# Altium PCB stm32f407_copter.PcbDoc
Units mil, origin at the board's own origin, x right, y up, seen from the top; angles counter-clockwise.
Board outline 2185 x 2115 mil, 4 copper layers (Top Layer, Signal Layer 2, Signal, Bottom Layer), stack 47.234 mil thick; 67 components, 56 nets, 303 pads, 114 vias.
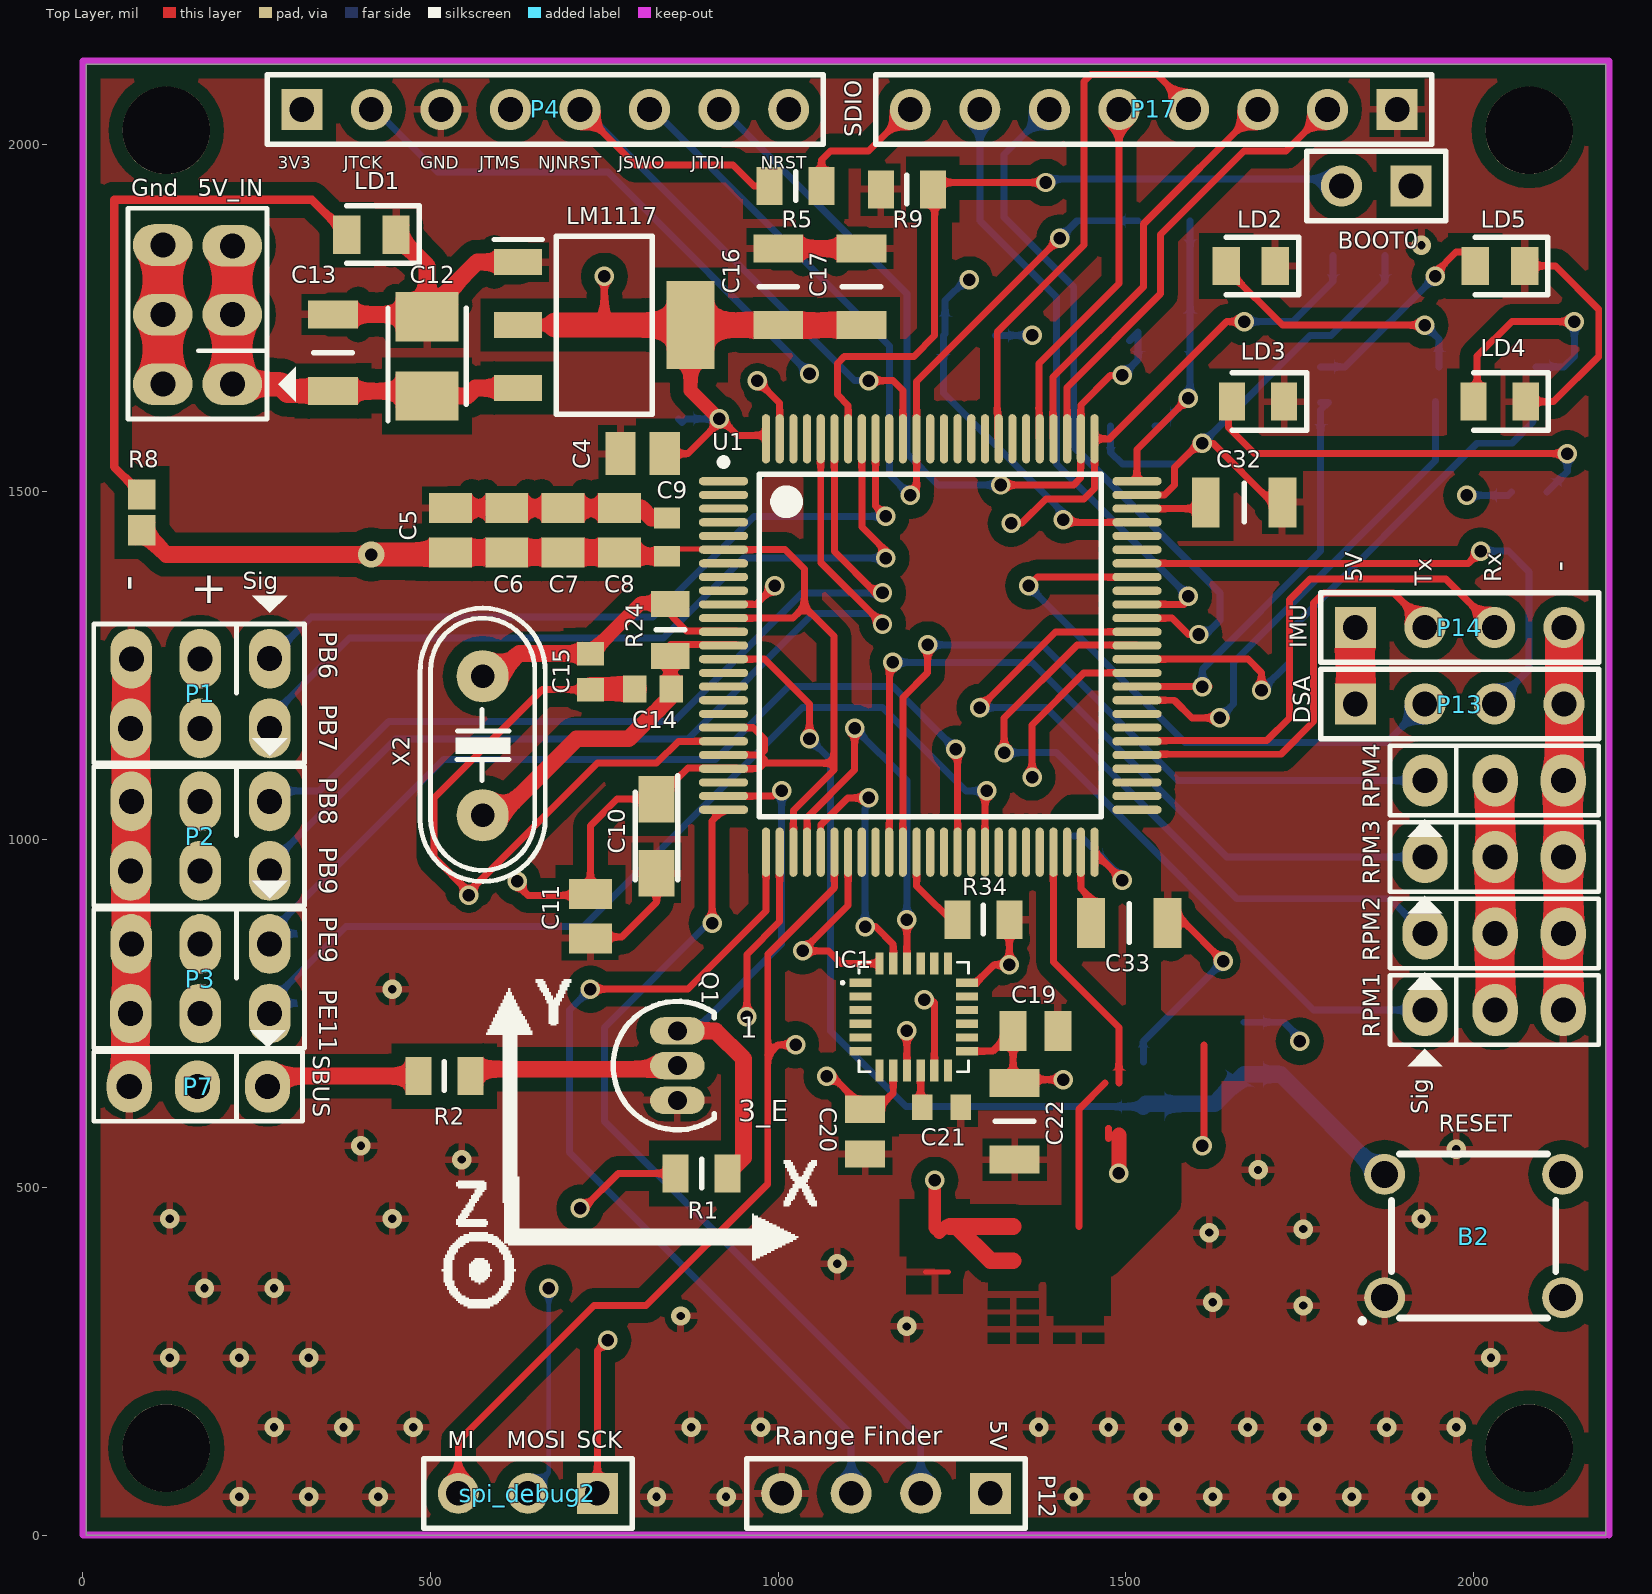
[diagram p0: Top Layer view]
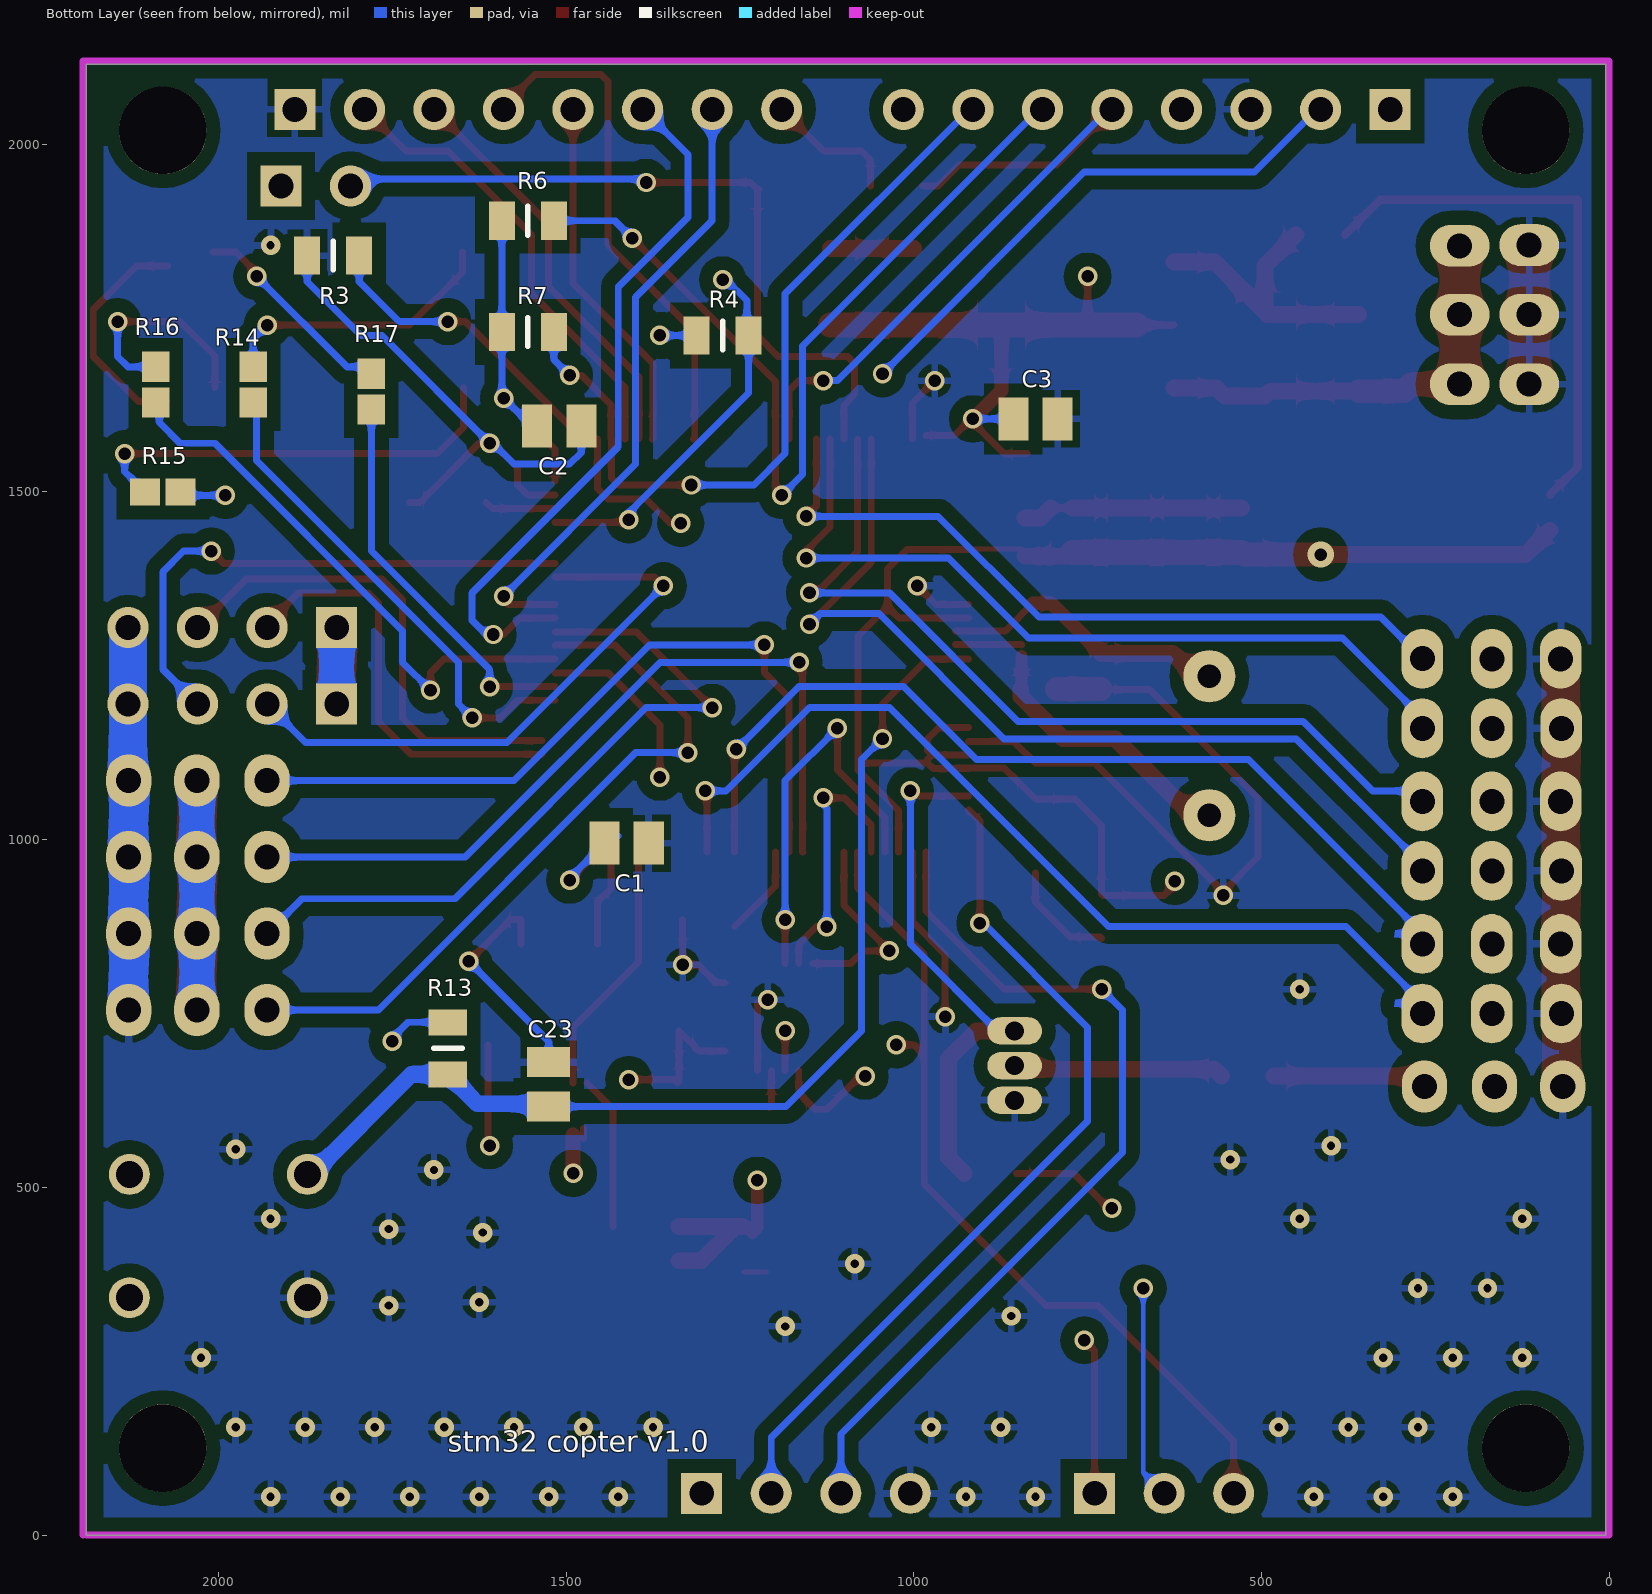
[diagram p1: Bottom Layer view, seen from below]
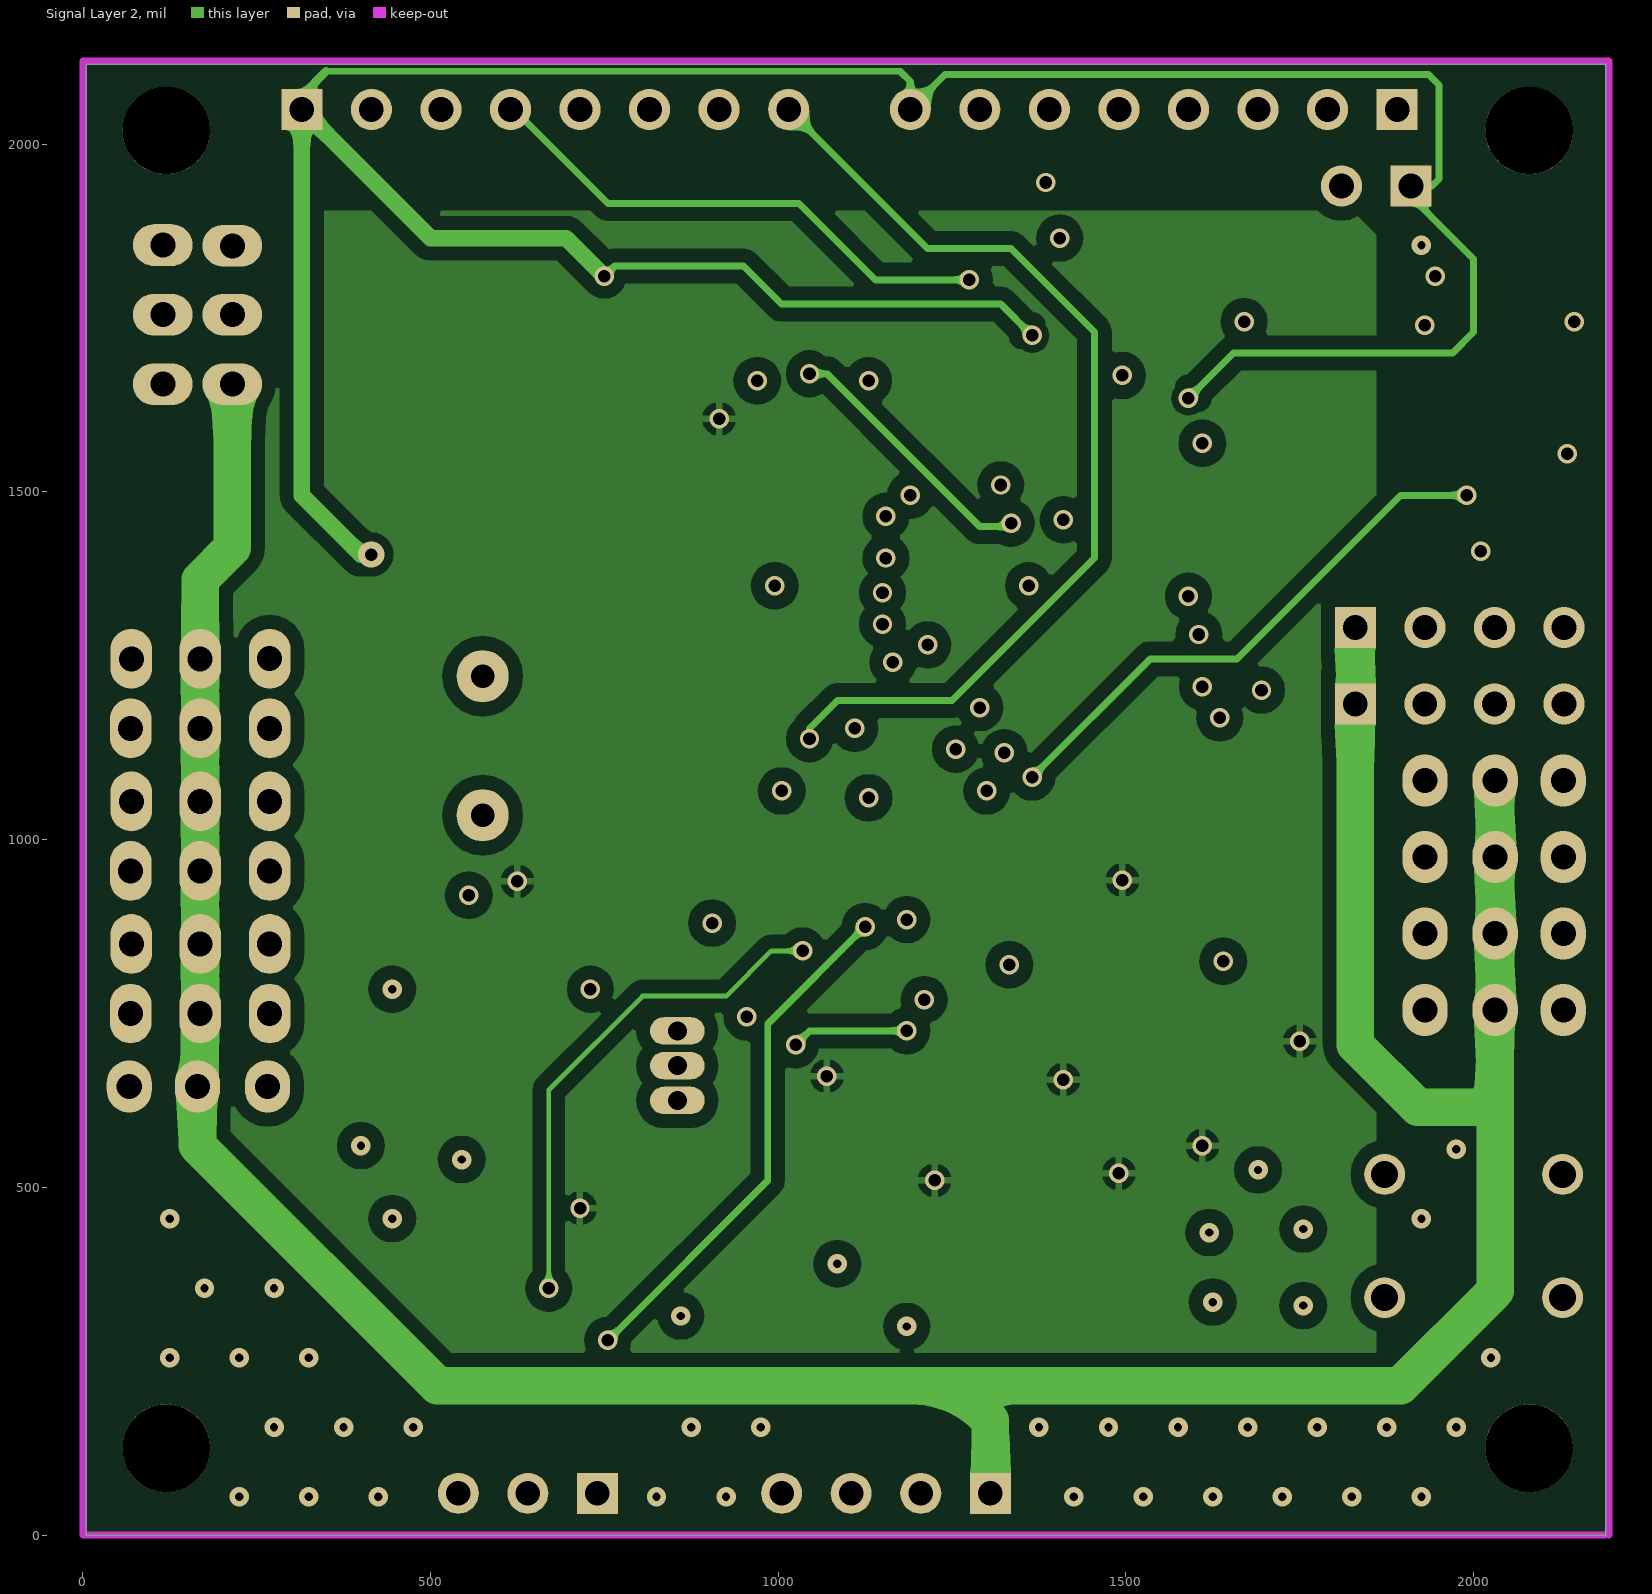
[diagram p2: Signal Layer 2]
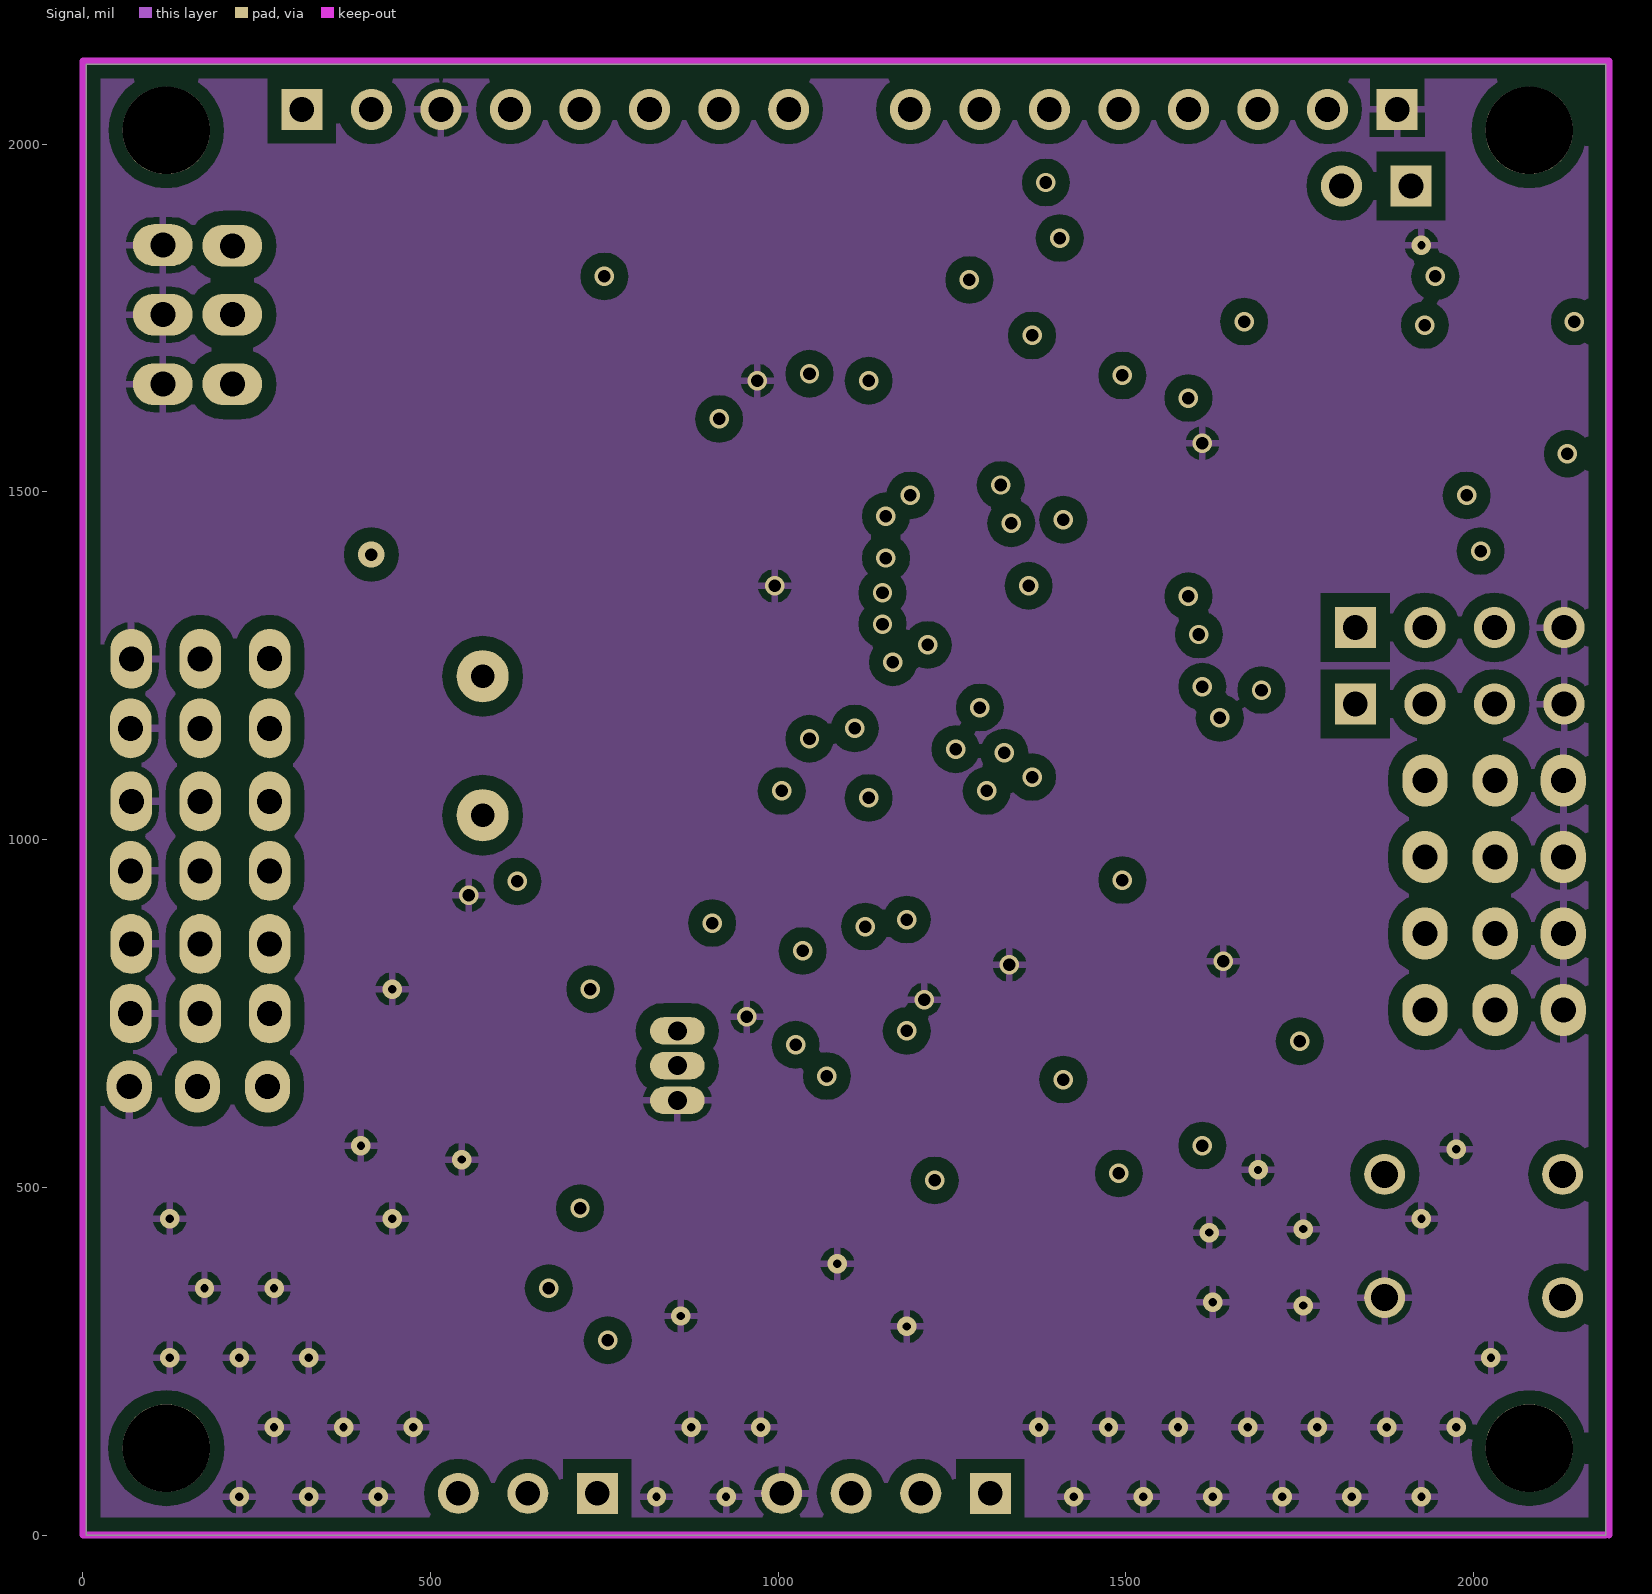
[diagram p3: Signal]
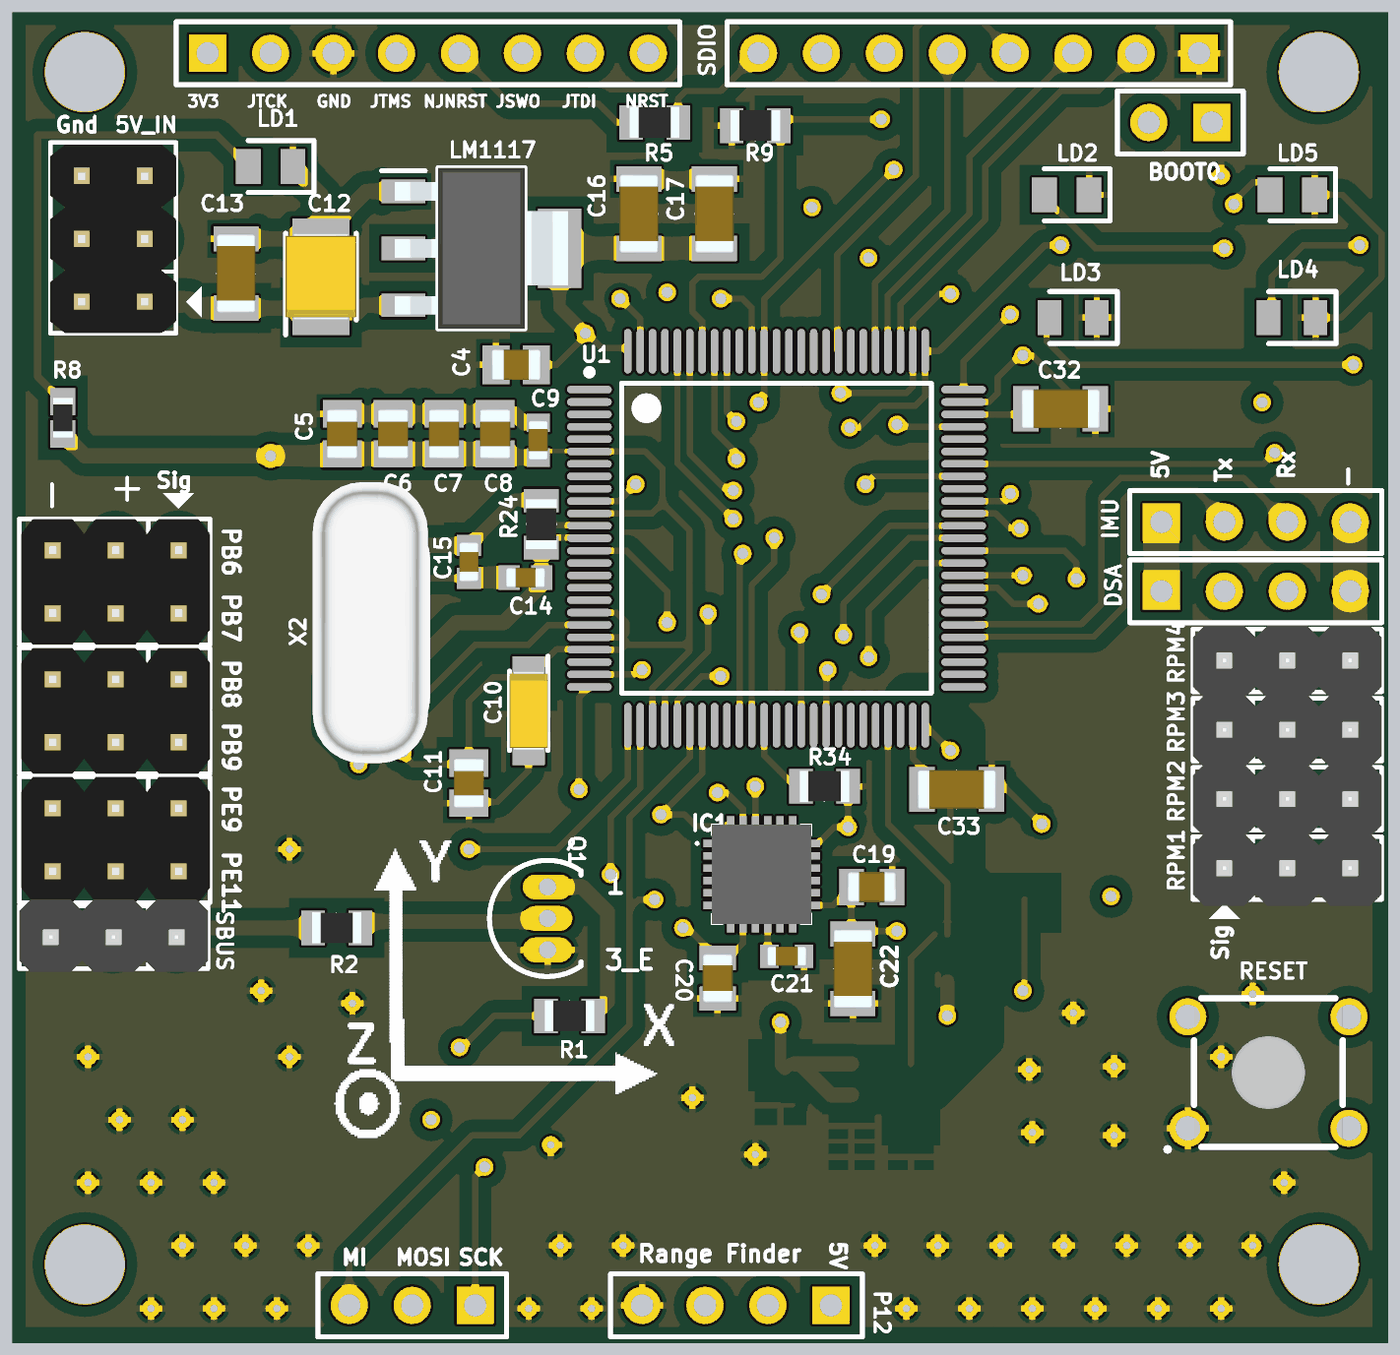
[diagram p4: 3D render of the assembled board from above, using the file's embedded part models]
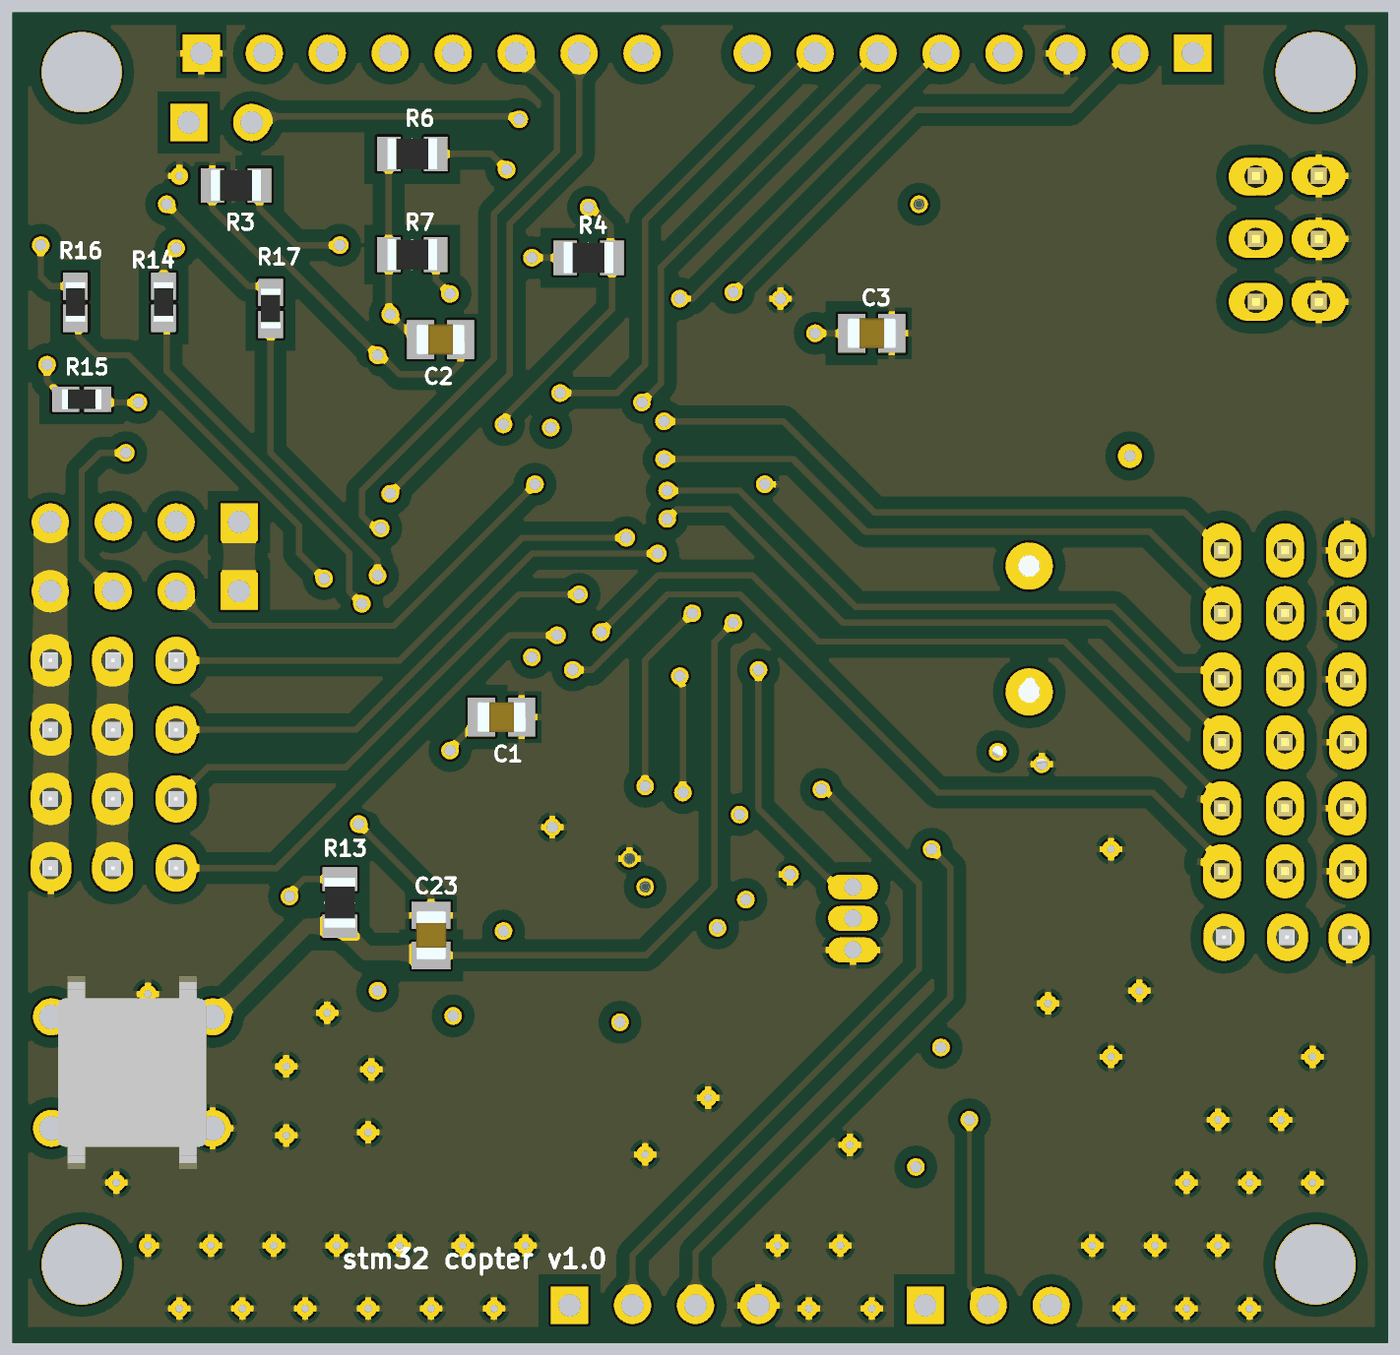
[diagram p5: 3D render of the assembled board from below, using the file's embedded part models]

## Layer stack, top to bottom
Top Solder: solder mask 0.4, Solder Resist, Dk 3.5
Top Layer: signal copper 1.4
Dielectric 1: core 24, FR-4, Dk 4.2
Signal Layer 2: signal copper 1.417
Dielectric 3: prepreg 5, FR-4, Dk 4.2
Signal: signal copper 1.417
Dielectric 2: core 12.6, FR-4, Dk 4.2
Bottom Layer: signal copper 1.4
Bottom Solder: solder mask 0.4, Solder Resist, Dk 3.5

## Board outline
5,0 5,2115 2190,2115 2190,0

## Design rules (kind name [scope] priority, off if disabled: settings)
Clearance [All] p1: gap=7 except(10: THPad-Region; 20: Arc-Poly Arc-Region Track-Poly Track-Region SMDPad-Poly SMDPad-Region THPad-Poly Via-Poly Via-Region Fill-Poly Fill-Region Poly-Poly Poly-Region Region-Region)
HoleSize [All] p1: absolutevalues=TRUE maxlimit=140 minlimit=1 maxpercent=80.000 minpercent=20.000
PolygonConnect [All] p1: connectstyle=Relief reliefconductorwidth=10 reliefentries=4 polygonreliefangle="90 Angle" airgapwidth=10
RoomDefinition user [InComponentClass('user')] p1: confinementstyle=ConfineIn formatcopy=TRUE lockcomponents=FALSE outline 3965,2200 7905,2200 7905,3085 3965,3085
RoomDefinition STM32F407VGT6 [InComponentClass('STM32F407VGT6')] p2: confinementstyle=ConfineIn formatcopy=TRUE lockcomponents=FALSE outline 3966.65,1230 7631.65,1230 7631.65,2160 3966.65,2160
RoomDefinition SENSORS [InComponentClass('SENSORS')] p3: confinementstyle=ConfineIn formatcopy=TRUE lockcomponents=FALSE outline 3965,255 5700,255 5700,1175 3965,1175
RoomDefinition power [InComponentClass('power')] p4: confinementstyle=ConfineIn formatcopy=TRUE lockcomponents=FALSE outline 3965,-320 7830,-320 7830,205 3965,205
RoomDefinition Pinout [InComponentClass('Pinout')] p5: confinementstyle=ConfineIn formatcopy=TRUE lockcomponents=FALSE outline 3975,-930 6305,-930 6305,-405 3975,-405
RoutingVias [All] p1: holewidth=28 width=15 viastyle="Through Hole" minholewidth=18 minwidth=28 maxholewidth=25 maxwidth=38
SolderMaskExpansion [All] p1: expansion=4
Width [All] p1: maxlimit=54 minlimit=7 preferedwidth=10 midlayer1_maxwidth=10 bottomlayer_maxwidth=48 minimp=50.000000 maximp=50.000000 favimp=50.000000
29 further rules are at their usual default settings.

## Classes and differential pairs
component class Pinout: P1 P2 P3 P7 P10 P12 P13 P14 RPM1 RPM2 RPM3 RPM4
component class power: 5V_IN C1 C2 C3 C4 C5 C6 C7 C8 C9 C10 C11 C12 C13 C16 C17 LD1 LM1117 R8
component class SENSORS: C19 C20 C21 C22 IC1 P17 spi_debug2
component class STM32F407VGT6: BOOT0 C14 C15 C32 C33 P4 Q1 R1 R2 R3 R4 R5 R6 R7 R9 R24 R34 U1 X2
component class user: B2 C23 LD2 LD3 LD4 LD5 R13 R14 R15 R16 R17

## Components (designator, comment, footprint, x,y, rotation, side; value= is the part's Value field where it differs from the comment)
5V_IN "INPUT_POWER" JP3x2#1 165,1755 r90 top
B2 "RESET" 3-1825910-5 2000,430 r180 top
BOOT0 "Header 2" HDR1X2 1910,1940 r180 top
C1 "104" CAPC2012X98N 1413.11,995 r180 bottom
C2 "104" CAPC2012X98N 1510,1595 r180 bottom
C3 "104" CAPC2012X98N 825,1605 r180 bottom
C4 "104" CAPC2012X98N 805,1555 r180 top
C5 "104" CAPC2012X98N 528.66,1445 r90 top
C6 "104" CAPC2012X98N 609.65,1445 r90 top
C7 "104" CAPC2012X98N 690.63,1445 r90 top
C8 "104" CAPC2012X98N 771.61,1445 r90 top
C9 "1uF" CAPC1608X90N 840,1435 r270 top
C10 "1uF" CAPPM3216X180N 825,1005 r270 top
C11 "104" CAPC2012X98N 730,890 r270 top
C12 "10uF" CAPPM3528X210N 495,1695 r90 top
C13 "Cap_0603" CAPC3216X135N 360,1700.12 r270 top
C14 "22pF" CAPC1608X95N 820,1216.65 r180 top
C15 "22pF" CAPC1608X95N 730,1241.65 r270 top
C16 "Cap_0603" CAPC3216X135N 1000,1795 r270 top
C17 "Cap_0603" CAPC3216X135N 1120,1795 r270 top
C19 "0.1uF" CAPC2012X145N 1370,725 r0 top
C20 "10nF" CAPC2012X145N 1125,580 r270 top
C21 "0.47uF" CAPC1608X90N 1235,615 r180 top
C22 "2.2uF" CAPC3216X125N 1340,595 r90 top
C23 "104" CAPC2012X98N 1525,648.11 r90 bottom
C32 "2.2uF" CAPC3216X125N 1670,1485 r180 top
C33 "2.2uF" CAPC3216X125N 1505,880 r180 top
IC1 "ICM-20689" ICM20689 1195,745 r0 top
LD1 "LTST-C171GKT" LEDC2012X120N 415,1870 r180 top
LD2 "LTST-C171GKT" LEDC2012X120N 1679.57,1825 r180 top
LD3 "LTST-C171GKT" LEDC2012X90N 1690,1630 r180 top
LD4 "LTST-C171GKT" LEDC2012X90N 2037.6,1630 r180 top
LD5 "LTST-C171GKT" LEDC2012X120N 2038.03,1825 r180 top
LM1117 "LM1117IMPX3.3_NOPB" SOT230P700X180-4N 750,1740 r0 top
P1 "PWM1" JP3x2#2 168.79,1210 r180 top
P2 "PWM2" JP3x2#1 168.79,1005 r180 top
P3 "PWM3" JP3x2#1 168.79,800 r180 top
P4 "Header 8" HDR1X8 315,2050 r0 top
P7 "SBUS" JP3 165.79,645 r180 top
P12 "Range Finder" HDR1X4 1305,60 r180 top
P13 "DSA" HDR1X4 1830,1195 r0 top
P14 "IMU" HDR1X4 1830,1305 r0 top
P17 "SDIO" HDR1X8 1890,2050 r180 top
Q1 "NPN1" TO-92 855,675 r0 top locked
R1 "" RESC2012X60N 890,520 r0 top
R2 "1K" RESC2012X60N 520,660 r180 top
R3 "" RESC2012X60N 1835,1840 r0 bottom
R4 "" RESC2012X60N 1275,1725 r0 bottom
R5 "" RESC2012X60N 1025,1940 r180 top
R6 "" RESC2012X60N 1555,1890 r180 bottom
R7 "" RESC2012X60N 1555,1730 r0 bottom
R8 "" RESC1608X55N 85,1470.59 r90 top
R9 "" RESC2012X60N 1185,1935 r180 top
R13 "" RESC2012X60N 1670,700 r270 bottom locked
R14 "" RESC1608X55N 1950,1654.41 r90 bottom
R15 "" RESC1608X55N 2080,1500 r0 bottom
R16 "" RESC1608X55N 2090,1654.41 r90 bottom
R17 "" RESC1608X55N 1780,1644.41 r90 bottom
R24 "" RESC2012X60N 845,1301.65 r90 top
R34 "" RESC2012X60N 1295,885 r180 top
RPM1 "Jumper 3" JP3 2030,755 r0 top
RPM2 "Jumper 3" JP3 2030,865 r0 top
RPM3 "Jumper 3" JP3 2030,975 r0 top
RPM4 "Jumper 3" JP3 2030,1085 r0 top
spi_debug2 "Header 3" HDR1X3 740,60 r180 top
U1 "STM32F407VGT6" STM-LQFP100_N 1218.66,1279.21 r0 top
X2 "8Mhz" XT2 575,1135 r270 top

## Footprints (in the part's own frame and the unit in brackets; to place one, negate y for a bottom-side part, rotate by r counter-clockwise, add the part's x,y. Pads: shape width x height; smd on the part's side, far side on the other; paste and mask are expansions set on the pad)
3-1825910-5 [mm]
  round 1.49 hole 0.99: 1(3.25,2.25) 2(3.25,-2.25) 3(-3.25,2.25) 4(-3.25,-2.25)
  silkscreen extent -3,-3 4.11,3.14, body extent -3,-3.9 3,3.9
CAPC1608X90N [mm]
  rect 0.75x0.94 smd: 1(-0.7,0) 2(0.7,0)
  body extent -0.8,-0.4 0.8,0.4, height 0.9
CAPC1608X95N [mm]
  rect 0.86x0.98 smd: 1(-0.66,0) 2(0.66,0)
  body extent -0.8,-0.4 0.8,0.4, height 0.95
CAPC2012X98N [mm]
  rect 1.1x1.57 smd: 1(-0.81,0) 2(0.81,0)
  body extent -1,-0.63 1,0.62, height 0.98
CAPC2012X145N [mm]
  rect 0.99x1.47 smd: 1(-0.82,0) 2(0.82,0)
  body extent -1,-0.63 1,0.63, height 1.45
CAPC3216X125N [mm]
  rect 1.02x1.82 smd: 1(-1.4,0) 2(1.4,0)
  silkscreen extent 0,-0.7 0,0.7, body extent -1.6,-0.8 1.6,0.8, height 1.25
CAPC3216X135N [mm]
  rect 1.02x1.82 smd: 1(-1.4,0) 2(1.4,0)
  silkscreen extent 0,-0.7 0,0.7, body extent -1.6,-0.8 1.6,0.8, height 1.35
CAPPM3216X180N [mm]
  rect 1.7x1.3 smd: 1(-1.35,0) 2(1.35,0)
  silkscreen extent -2.2,-0.77 1.6,0.77, body extent -1.6,-0.77 1.6,0.77, height 1.8
CAPPM3528X210N [mm]
  rect 1.8x2.3 smd: 1(-1.45,0) 2(1.45,0)
  silkscreen extent -2.35,-1.43 1.75,1.43, body extent -1.75,-1.43 1.75,1.43, height 2.1
HDR1X2 [mm] "Connector; Header; 2 Position"
  rect 1.5x1.5 hole 0.9: 1(0,0)
  round 1.5 hole 0.9: 2(2.54,0)
  silkscreen extent -1.27,-1.27 3.81,1.27
HDR1X3 [mm] "Connector; Header; 3 Position"
  rect 1.5x1.5 hole 0.9: 1(0,0)
  round 1.5 hole 0.9: 2(2.54,0) 3(5.08,0)
  silkscreen extent -1.27,-1.27 6.35,1.27
HDR1X4 [mm] "Connector; Header; 4 Position"
  rect 1.5x1.5 hole 0.9: 1(0,0)
  round 1.5 hole 0.9: 2(2.54,0) 3(5.08,0) 4(7.62,0)
  silkscreen extent -1.27,-1.27 8.89,1.27
HDR1X8 [mm] "Connector; Header; 8 Position"
  rect 1.5x1.5 hole 0.9: 1(0,0)
  round 1.5 hole 0.9: 2(2.54,0) 3(5.08,0) 4(7.62,0) 5(10.16,0) 6(12.7,0) 7(15.24,0) 8(17.78,0)
  silkscreen extent -1.27,-1.27 19.05,1.27
ICM20689 [mm]
  rect 0.8x0.3 smd: 1(-1.95,1.25) 2(-1.95,0.75) 3(-1.95,0.25) 4(-1.95,-0.25) 5(-1.95,-0.75) 6(-1.95,-1.25) 13(1.95,-1.25) 14(1.95,-0.75) 15(1.95,-0.25) 16(1.95,0.25) 17(1.95,0.75) 18(1.95,1.25)
  rect 0.3x0.8 smd: 7(-1.25,-1.95) 8(-0.75,-1.95) 9(-0.25,-1.95) 10(0.25,-1.95) 11(0.75,-1.95) 12(1.25,-1.95) 19(1.25,1.95) 20(0.75,1.95) 21(0.25,1.95) 22(-0.25,1.95) 23(-0.75,1.95) 24(-1.25,1.95)
  silkscreen extent -2.65,-2 2,2, body extent -2,-2 2,2, height 1.1
JP3 [mil] "Jumper 3"
  oval 65x75 hole 36: 1(-100,0) 2(1,0) 3(99,0)
  silkscreen extent -150,-81 150,50, body extent -150,-60 150,55, height 355
JP3x2#1 [mil] "Connector 3x2"
  oval 60x86 hole 36: 1(-100,-50) 2(0,-50) 3(99,-50) 4(-100,50) 5(0,50) 6(100,50)
  silkscreen extent -150,-141 153,100, body extent -150,-100 150,100, height 335
JP3x2#2 [mil] "Connector 3x2"
  oval 60x86 hole 36: 1(-100,-50.25) 2(0,-50) 3(99,-50) 4(-100,50) 5(0,50) 6(100,50)
  silkscreen extent -150,-141 153,100, body extent -150,-100 150,100, height 335
LEDC2012X90N [mm]
  rect 0.95x1.4 smd: 1(-0.95,0) 2(0.95,0)
  silkscreen extent -1.78,-1.05 0.95,1.05
LEDC2012X120N [mm]
  rect 1x1.4 smd: 1(-0.9,0) 2(0.9,0)
  silkscreen extent -1.75,-1.05 0.9,1.05
RESC1608X55N [mm]
  rect 1.1x1 smd: 1(-0.65,0) 2(0.65,0)
  body extent -0.8,-0.4 0.8,0.4, height 0.55
RESC2012X60N [mm]
  rect 0.95x1.4 smd: 1(-0.95,0) 2(0.95,0)
  silkscreen extent 0,-0.53 0,0.53, body extent -1,-0.62 1,0.62, height 0.6
SOT230P700X180-4N [mm]
  rect 1.75x0.95 smd: 1(-3.15,2.3) 2(-3.15,0) 3(-3.15,-2.3)
  rect 1.75x3.2 smd: 4(3.15,0)
  silkscreen extent -4.03,-3.25 1.75,3.25, body extent -3.5,-3.25 3.5,3.25, height 1.8
STM-LQFP100_N [mm] "Thin QFP, 100-Leads, Body 14x14mm, Pitch 0.5mm, IPC Medium Density"
  oval 1.8x0.3 smd: 1(-7.55,6) 2(-7.55,5.5) 3(-7.55,5) 4(-7.55,4.5) 5(-7.55,4) 6(-7.55,3.5) 7(-7.55,3) 8(-7.55,2.5) 9(-7.55,2) 10(-7.55,1.5) 11(-7.55,1) 12(-7.55,0.5) 13(-7.55,0) 14(-7.55,-0.5) 15(-7.55,-1) 16(-7.55,-1.5) 17(-7.55,-2) 18(-7.55,-2.5) 19(-7.55,-3) 20(-7.55,-3.5) 21(-7.55,-4) 22(-7.55,-4.5) 23(-7.55,-5) 24(-7.55,-5.5) 25(-7.55,-6) 51(7.55,-6) 52(7.55,-5.5) 53(7.55,-5) 54(7.55,-4.5) 55(7.55,-4) 56(7.55,-3.5) 57(7.55,-3) 58(7.55,-2.5) 59(7.55,-2) 60(7.55,-1.5) 61(7.55,-1) 62(7.55,-0.5) 63(7.55,0) 64(7.55,0.5) 65(7.55,1) 66(7.55,1.5) 67(7.55,2) 68(7.55,2.5) 69(7.55,3) 70(7.55,3.5) 71(7.55,4) 72(7.55,4.5) 73(7.55,5) 74(7.55,5.5) 75(7.55,6)
  oval 0.3x1.8 smd: 26(-6,-7.55) 27(-5.5,-7.55) 28(-5,-7.55) 29(-4.5,-7.55) 30(-4,-7.55) 31(-3.5,-7.55) 32(-3,-7.55) 33(-2.5,-7.55) 34(-2,-7.55) 35(-1.5,-7.55) 36(-1,-7.55) 37(-0.5,-7.55) 38(0,-7.55) 39(0.5,-7.55) 40(1,-7.55) 41(1.5,-7.55) 42(2,-7.55) 43(2.5,-7.55) 44(3,-7.55) 45(3.5,-7.55) 46(4,-7.55) 47(4.5,-7.55) 48(5,-7.55) 49(5.5,-7.55) 50(6,-7.55) 76(6,7.55) 77(5.5,7.55) 78(5,7.55) 79(4.5,7.55) 80(4,7.55) 81(3.5,7.55) 82(3,7.55) 83(2.5,7.55) 84(2,7.55) 85(1.5,7.55) 86(1,7.55) 87(0.5,7.55) 88(0,7.55) 89(-0.5,7.55) 90(-1,7.55) 91(-1.5,7.55) 92(-2,7.55) 93(-2.5,7.55) 94(-3,7.55) 95(-3.5,7.55) 96(-4,7.55) 97(-4.5,7.55) 98(-5,7.55) 99(-5.5,7.55) 100(-6,7.55)
  silkscreen extent -7.67,-6.25 6.25,6.82, body extent -7,-7 7,7, height 1.6
TO-92 [mm] "TO, Flat Index; 3 In-Line, Axial Leads; Body Dia. 4.6mm; Leads 0.41 x 0.39 mm (max)"
  oval 2x1 hole 0.7: 1(0,1.27) 2(0,0) 3(0,-1.27)
  silkscreen extent -2.34,-2.34 1.35,2.34
XT2 [mil] "Footpin for Crystal 2 pin"
  round 75 hole 34: 1(-100,0) 2(100,0)
  silkscreen extent -198,-90 195,90, body extent -233,-93 213,90, height 138

## Part data
5V_IN P1 P2 P3: library part JP3x2, "Connector 3x2"
B2: library part SW-PB, "Switch"
BOOT0: "Header, 2-Pin"
C1 C2 C3 C4 C5 C6 C7 C8 C9 C11 C14 C15 C19 C20 C21 C22 C23 C32 C33: library part "Cap Semi", "Capacitor (Semiconductor SIM Model)"
C10: library part "Cap Pol2", "Polarized Capacitor (Axial)"
C12: library part Cap_Tan_1210, "Tantalum Capacitor"
C13 C16 C17: "Capacitor"
IC1 LM1117: "Integrated Circuit"
LD1 LD2 LD3 LD4 LD5: "LED"
P4: "Header, 8-Pin"
P7: library part JP3, "Jumper 3"
P12 P13 P14: library part "Header 4", "Header, 4-Pin"
P17: library part "Header 8", "Header, 8-Pin"
Q1: "NPN Darlington Bipolar Transistor"
R1 R2 R3 R4 R5 R6 R7 R8 R9 R13 R14 R15 R16 R17 R24 R34: library part Res3, "Resistor"
RPM1 RPM2 RPM3 RPM4: library part JP3
spi_debug2: "Header, 3-Pin"
U1: "ARM Cortex-M4 32-bit MCU+FPU, 210 DMIPS, 1024 kB Flash, 192 kB Internal RAM, 82 I/Os, 100-pin LQFP, -40 to 85 degC, Tray"
X2: library part XT2, "Crystal For all Crystal 2pin."

## Free pads (board coordinates)
  round 126 hole 126: 2(2080,2020) 3(2080,125) 4(120,125) 5(120,2020)

## Via types
v1: diameter 28, hole 18, Top Layer to Bottom Layer, 68 vias
v2: diameter 28, hole 12, Top Layer to Bottom Layer, 45 vias
v3: diameter 38, hole 18, Top Layer to Bottom Layer, 1 vias

## Nets (pads, with @x,y where several pads share a name; then routed paths per layer and width w, separated by ;. In a path a pad name is that pad's centre, name@x,y a point inside that pad or via, vN(x,y) a via of type N, cw(c..) or ccw(c..) an arc to the next point about the centre after c; other vN are vias at no path point)
3V3: BOOT0.1 C1.1 C2.1 C3.1 C4.1 C5.1 C6.1 C7.1 C8.1 C9.2 C10.1 C11.1 C16.2 C17.2 C19.1 C20.1 C22.2 IC1.8 IC1.13 LM1117.2 LM1117.4 P4.1 P17.8 R1.1 R4.2 R5.1 R6.1 R7.2 R8.1 R13.1 U1.6 U1.11 U1.19 U1.21 U1.22 U1.28 U1.50 U1.75 U1.100 | length 9286.8
  Top Layer w7: C8.1 C8.1@777.28,1407.44 ; C9.2 C9.2@844.33,1403.11 ; C9.2@844.33,1418.11 U1.6@940,1418.11
  Top Layer w10: v1(625,940) 625,935 640,920 728.11,920 C11.1 730,1020 768.15,1058.15 C10.1 870,1103.15 U1.22@940,1103.15 ; LM1117.2 680,1740 ; v1(715,470) 720,470 770,520 R1.1 ; 750,1740 v1(750,1810) ; C4.1 870,1555 915,1600 920,1600 v1(915,1605) 917.91,1605 941.46,1581.46 U1.100@982.44,1581.46 ; U1.22 972.05,1102.05 980,1110 ; U1.21 973.27,1121.73 ; U1.19 963.9,1161.1 980,1145 980,1128.46 973.27,1121.73 ; U1.11 1021.21,1318.58 1037.63,1335 ; U1.6 1009.69,1417.01 1037.63,1389.06 1037.63,1335 ; U1.28 1021.81,1041.81 1080,1100 1080,1110 ; R5.1 1062.4,1977.4 1075,1990 1130,1990 P17.8 ; v1(1070,660) 1077.28,660 C20.1 1142.28,612.28 1165.47,635.47 IC1.8 ; IC1.13 1308.5,695.79 C19.1 1337.72,652.4 C22.2 1344.88,655 v1(1410,655) ; U1.50 v1(1495,941.85) ; U1.75 1515.91,1560.91 v1(1590,1635) ; 973.27,1121.73 980,1115 980,1110 ; 980,1110 1080,1110 ; 1037.63,1335 1080,1292.63 1080,1110
  Top Layer w20: LM1117.4 874.02,1645.98 v1(915,1605)
  Top Layer w24: R8.1 120,1410 v3(415,1410) ; C8.1@777.28,1407.44 C9.2
  Top Layer w34: v3(415,1410) C5.1@525,1410
  Top Layer w36: C5.1 C6.1 C7.1 C8.1 ; 680,1740 750,1740 LM1117.4 874.13,1739.88 C16.2 C17.2
  Signal Layer 2 w10: 350,2105 1175,2105 1190,2090 P17.8 1240,2100 1935,2100 1950,2085 1950,1950 1940,1940 BOOT0.1 1915,1935 1915,1920 2000,1835 2000,1730 1970,1700 1655,1700 v1(1590,1635) ; v1(750,1810) 765,1825 950,1825 1005,1770 1320,1770 v1(1365,1725)
  Signal Layer 2 w12: P4.1@315,2070 350,2105
  Signal Layer 2 w24: P4.1 315,1495 400,1410 v3(415,1410) ; P4.1@330,2035 500,1865 695,1865 v1(750,1810)
  Bottom Layer w10: C3.1 861.89,1600 866.89,1605 v1(915,1605) ; R4.2 v1(1365,1725) ; C1.1@1425,1005 1435,1005 C1.1 1495,945 v1(1495,941.85) ; C2.1 1550,1595 v1(1590,1635) 1592.4,1637.4 R7.2 R6.1 ; R13.1 1727.6,737.4 1750,715 v1(1750,710)
5V_IN: 5V_IN.1 5V_IN.2 5V_IN.3 C12.1 C13.2 LM1117.3 P1.2 P1.5 P2.2 P2.5 P3.2 P3.5 P7.2 P12.1 P13.1 P14.1 RPM1.2 RPM2.2 RPM3.2 RPM4.2 | length 6437.2
  Top Layer w24: C13.2 487.91,1645 C12.1 552.91,1637.91 564.45,1649.45 LM1117.3
  Top Layer w34: 5V_IN.1 285,1655 295,1645 C13.2
  Top Layer w54: 5V_IN.1 5V_IN.2 5V_IN.3 ; P13.1 P14.1 ; RPM1.2 RPM2.2 RPM3.2 RPM4.2
  Signal Layer 2 w54: 5V_IN.1 215,1420 168.79,1373.79 P1.2 P1.5 P2.2 P2.5 P3.2 P3.5 168.79,649 P7.2 164.79,560.21 510,215 1255,215 ; P12.1 1305,165 1255,215 ; P14.1 P13.1 1830,705 1920,615 2016,615 2031,630 ; RPM4.2 RPM3.2 RPM2.2 RPM1.2 2031,630 ; 1255,215 1895,215 2031,351 2031,630
  Bottom Layer w48: P13.1 P14.1 ; RPM1.2 RPM2.2 RPM3.2 RPM4.2
BOOT0: BOOT0.2 R9.1 U1.94 | length 1079.5
  Top Layer w10: U1.94 1100.55,1624.45 1085,1640 1085,1685 1095,1695 1195,1695 1225,1725 R9.1@1225,1935 ; R9.1 R9.1@1225,1935 ; v1(1385,1945) 1235,1945 R9.1@1225,1935
  Bottom Layer w10: v1(1385,1945) 1390,1945 1395,1950 1800,1950 BOOT0.2
BOOT1: R34.2 U1.37 | length 131.3
  Top Layer w10: U1.37 1198.98,933.62 R34.2@1257.6,875
GND: 5V_IN.4 5V_IN.5 5V_IN.6 B2.1 C1.2 C2.2 C3.2 C4.2 C5.2 C6.2 C7.2 C8.2 C9.1 C10.2 C11.2 C12.2 C13.1 C14.2 C15.2 C16.1 C17.1 C19.2 C20.2 C21.1 C22.1 C23.2 C32.1 C33.1 IC1.11 IC1.18 LD1.1 LD2.1 LD3.1 LD4.1 LD5.1 LM1117.1 P1.3 P1.6 P2.3 P2.6 P3.3 P3.6 P4.3 P7.3 P12.4 P13.4 P14.4 P17.1 Q1.3 R3.2 R9.2 R34.1 RPM1.3 RPM2.3 RPM3.3 RPM4.3 U1.10 U1.20 U1.27 U1.74 U1.99 | length 6138.6
  Top Layer w7: C8.2 803.11,1476.89 ; v1(1332.4,820) v1@1335,817.4
  Top Layer w10: v1(555,920) v1@555,925 ; C11.2 731.89,860 775,860 825,910 C10.2 ; C15.2@730.98,1216.65 C15.2 660.67,1215.67 505,1060 505,975 v1@555,925 ; U1.20 856.42,1141.42 825,1110 740,1110 v1@555,925 ; U1.10 968.27,1338.27 v1(995,1365) ; v1(955,745) 955,835 1002.13,882.13 U1.27 ; v1(970,1660) 1002.13,1627.87 U1.99 ; v1(1210,770) 1220,770 1224.53,765.47 IC1.11 ; IC1.18 1284.21,794.21 1310,820 v1(1332.4,820) R34.1 ; U1.74 1555.75,1495.75 1570,1510 1570,1535 1605,1570 v1(1610,1570) 1625,1570 1710,1485 C32.1 ; C33.1@1565.12,850 1565.12,885 1580,885 v1(1640,825) ; LD5.1 2117.5,1825 2180,1762.5 2180,1695 2115,1630 LD4.1
  Top Layer w24: C13.1 491.85,1755.24 C12.2@495,1758.39 ; LD1.1 495,1825.43 C12.2@495,1758.39 ; C5.2 C6.2 C7.2 C8.2 ; LM1117.1 567.17,1830.55 C12.2@495,1758.39 ; 803.11,1476.89 817.44,1462.56 C9.1 ; C16.1 C17.1
  Top Layer w34: C15.2@730.98,1216.65 C14.2
  Top Layer w54: P7.3 68.79,647 P3.6 69.79,751 P3.3 68.79,851 P2.6 69.79,956 P2.3 68.79,1056 P1.6 69.79,1161 P1.3 ; 5V_IN.4 5V_IN.5 5V_IN.6 ; RPM1.3 RPM2.3 RPM3.3 RPM4.3 2130,1086 P13.4 P14.4
  Bottom Layer w10: C2.2 1478.11,1556.89 1495,1540 1575,1540 1605,1570 v1(1610,1570) 1765,1725 1795,1725 1872.4,1802.4 R3.2 ; C23.2 1525,710 v1(1640,825)
  Bottom Layer w54: RPM1.3 RPM2.3 RPM3.3 RPM4.3 2130,1086 P13.4 P14.4
  other v2: 225,55 325,55 425,55 825,55 925,55 1425,55 1525,55 1625,55 1725,55 1825,55 1925,55 275,155 375,155 475,155 875,155 975,155 1375,155 1475,155 1575,155 1675,155 1775,155 1875,155 1975,155 125,255 225,255 325,255 2025,255 1185,300 860,315 1755,330 1625,335 175,355 275,355 1085,390 1620,435 1755,440 125,455 445,455 1925,455 1690,525 545,540 1975,555 400,560 445,785 1925,1855
I2C2_SCL: U1.47 | length 371.2
  Top Layer w10: U1.47 1395.83,824.17 1490,730 1490,649.8
I2C2_SDA: U1.48
JSWO: P4.6 R6.2 U1.89 | length 1297.3
  Top Layer w10: v1(1190,1495) 1198.98,1503.98 U1.89 1198.98,1658.98 v1(1405,1865)
  Bottom Layer w10: P4.6@815,2055 1160,1710 1160,1525 v1(1190,1495) ; v1(1405,1865) 1430,1890 R6.2
JTCK-SWCLK: P4.2 R3.1 U1.76 | length 1861.5
  Top Layer w10: v1(1335,1455) 1350,1455 1385,1490 1440,1490 1454.88,1504.88 U1.76 1476.46,1576.46 1645,1745 v1(1670,1745)
  Signal Layer 2 w10: v1(1045,1670) 1070,1670 1290,1450 1335,1450 v1(1335,1455)
  Bottom Layer w10: P4.2@415,2055 510,1960 755,1960 v1(1045,1670) ; v1(1670,1745) 1740,1745 1797.6,1802.6 R3.1
JTDI: P4.7 R7.1 U1.77 | length 1156.9
  Top Layer w10: v1(1320,1510) 1425,1510 1435,1520 1435,1576.26 U1.77 1435.2,1625.2 1477.5,1667.5 v1(1495,1667.5)
  Bottom Layer w10: P4.7@915,2055 1185,1785 1185,1555 1230,1510 v1(1320,1510) ; v1(1495,1667.5) 1517.6,1690.1 R7.1 R7.1@1505,1717.4
JTMS-SWDIO: P4.4 R4.1 U1.72 | length 1305.8
  Top Layer w10: v1(1410,1460) 1413.62,1456.38 U1.72
  Signal Layer 2 w10: P4.4@615,2055 755,1915 1030,1915 1140,1805 v1(1275,1805)
  Bottom Layer w10: v1(1275,1805) 1270,1805 1240,1775 1240,1727.4 R4.1 1237.6,1642.4 1410,1470 v1(1410,1460)
LED_BLUE: R16.1 U1.62 | length 819.5
  Top Layer w10: U1.62 1675.47,1259.53 1695,1240 v1(1695,1215)
  Bottom Layer w10: v1(1695,1215) 1735,1255 1735,1300 2005,1570 2055,1570 2085,1600 2085,1624.41 R16.1@2090,1629.41
LED_GREEN: R15.1 U1.61 | length 1116.3
  Top Layer w10: v1(1365,1090) 1365,1165 1440,1240 1440.16,1239.84 U1.61
  Signal Layer 2 w10: v1(1365,1090) 1535,1260 1660,1260 1895,1495 v1(1990,1495)
  Bottom Layer w10: v1(1990,1495) 2049.41,1495 R15.1
LED_RED: R14.1 U1.59 | length 723.1
  Top Layer w10: U1.59 1569.53,1200.47 1595,1175 v1(1635,1175) v1@1645,1175
  Bottom Layer w10: v1(1635,1175) 1655,1195 1655,1255 1945,1545 R14.1@1945,1630
LED_YELLOW: R17.1 U1.60 | length 608.9
  Top Layer w10: U1.60 1619.84,1220.16 1619.69,1220 v1(1610,1220)
  Bottom Layer w10: v1(1610,1220) 1610,1245 1780,1415 1780,1617.64 1791.18,1628.82 R17.1@1780,1628.82
M1_RPM: RPM1.1 U1.63 | length 1043
  Top Layer w10: v1(1325,1125) 1325,1175 1430,1280 1515.12,1280 U1.63
  Bottom Layer w10: v1(1325,1125) 1400,1125 1770,755 RPM1.1
M2_RPM: RPM2.1 U1.64 | length 1045.6
  Top Layer w10: v1(1290,1190) 1398.9,1298.9 U1.64
  Bottom Layer w10: v1(1290,1190) 1385,1190 1660,915 1880,915 RPM2.1
M3_RPM: RPM3.1 U1.35 | length 1156.2
  Top Layer w10: U1.35 1160,982.36 1160,1250 v1(1165,1255)
  Bottom Layer w10: v1(1165,1255) 1365,1255 1645,975 RPM3.1
M4_RPM: RPM4.1 U1.36 | length 1108.6
  Top Layer w10: U1.36 1179.29,1204.29 1215,1240 v1(1215,1280)
  Bottom Layer w10: v1(1215,1280) 1380,1280 1575,1085 RPM4.1
NetC14_1: C14.1 R24.1 U1.13 X2.2 | length 495.9
  Top Layer w10: R24.1@845,1280 845.32,1280.32 U1.13@940,1280.32
  Top Layer w17: R24.1 845,1217.64 C14.1
  Top Layer w24: X2.2 600,1035 710,1145 785,1145 818.36,1178.36 818.81,1178.36 829.94,1189.49 829.94,1189.94 845.98,1205.98 C14.1
NetC15_1: C15.1 R24.2 U1.12 X2.1 | length 425.1
  Top Layer w10: R24.2@828.31,1340 868.31,1300 U1.12@940,1300
  Top Layer w20: C15.1 802.36,1340 R24.2@828.31,1340
  Top Layer w24: X2.1 595,1235 627.64,1267.64 C15.1
NetC21_2: C21.2 IC1.10 | length 54.3
  Top Layer w10: IC1.10 1204.84,617.6 C21.2
NetC32_2: C32.2 U1.73 | length 102.7
  Top Layer w10: U1.73 1605.94,1476.06 C32.2
NetC33_2: C33.2 U1.49 | length 140.1
  Top Layer w10: U1.49 1435.2,929.8 1454.88,910.12 C33.2@1454.88,850
NetLD1_2: LD1.2 R8.2 | length 795.7
  Top Layer w12: R8.2 45,1536.18 45,1920 329.57,1920 LD1.2
NetLD2_2: LD2.2 R14.2 | length 409.7
  Top Layer w10: LD2.2@1649.13,1845 1649.13,1815.87 1725,1740 v1(1930,1740)
  Bottom Layer w10: v1(1930,1740) 1950,1720 R14.2
NetLD3_2: LD3.2 R15.2 | length 627.7
  Top Layer w10: LD3.2@1647.6,1650 1647.6,1592.4 1685,1555 v1(2135,1555)
  Bottom Layer w10: R15.2 2135,1529.41 v1(2135,1555)
NetLD4_2: LD4.2 R16.2 | length 316.8
  Top Layer w10: LD4.2@2005.2,1650 2005.2,1695.2 2055,1745 v1(2145,1745)
  Bottom Layer w10: R16.2 2130,1680 2145,1695 v1(2145,1745)
NetLD5_2: LD5.2 R17.2 | length 298.9
  Top Layer w10: v1(1945,1810) 1945,1815 1975,1845 LD5.2@2007.6,1845
  Bottom Layer w10: R17.2@1780,1680 1815,1680 v1(1945,1810)
NetQ1_2: Q1.2 R2.1 | length 291.7
  Top Layer w24: R2.1 567.4,670 Q1.2@845,670
NJNRST: P4.5 R5.2 U1.90 | length 1021.2
  Top Layer w10: P4.5 795,1970 935,1970 965,1940 R5.2 ; v1(1130,1660) 1165,1660 1179.29,1645.71 U1.90
  Bottom Layer w10: P4.5@715,2055 1110,1660 v1(1130,1660)
NRST: B2.2 C23.1 P4.8 R13.2 U1.14 | length 2977.7
  Top Layer w10: U1.14 980.47,1259.53 1045,1195 v1(1045,1145)
  Signal Layer 2 w10: P4.8 1215,1850 1335,1850 1455,1730 1455,1405 1250,1200 1085,1200 1045,1160 v1(1045,1145)
  Bottom Layer w10: v1(1045,1145) 1075,1115 1075,725 1183.78,616.22 C23.1
  Bottom Layer w24: C23.1 1528.78,620 1627.4,620 R13.2 1722.4,662.6 1866.42,518.58 B2.2
PE9/TIM1CH1: P3.1 U1.40 | length 1319.8
  Top Layer w10: v1(1255,1130) 1258.03,1126.97 U1.40
  Bottom Layer w10: P3.1@268.79,865 518.79,1115 910,1115 1015,1220 1165,1220 v1(1255,1130)
PE11/TIM1CH2: P3.4 U1.42 | length 1346.1
  Top Layer w10: U1.42 1297.4,1067.4 v1(1300,1070)
  Bottom Layer w10: P3.4@268.79,765 378.79,875 720,875 1035,1190 1150,1190 1270,1070 v1(1300,1070)
PWM1: P1.1 U1.92 | length 1082.5
  Top Layer w10: U1.92 1139.92,1480.08 v1(1155,1465)
  Bottom Layer w10: P1.1@268.79,1275.25 283.79,1275.25 328.53,1320 820,1320 965,1465 v1(1155,1465)
PWM2: P1.4 U1.93 | length 1167.3
  Top Layer w10: U1.93 1120.24,1449.76 1155,1415 v1(1155,1405)
  Bottom Layer w10: P1.4@268.79,1175 383.79,1290 835,1290 950,1405 v1(1155,1405)
PWM3: P2.1 U1.95 | length 1255.2
  Top Layer w10: U1.95 1080.87,1414.13 1140,1355 v1(1150,1355)
  Bottom Layer w10: P2.1 P2.1@290,1055 ; P2.1@290,1070 340,1070 440,1170 850,1170 1035,1355 v1(1150,1355)
PWM4: P2.4 U1.96 | length 1337.7
  Top Layer w10: U1.96 1061.18,1398.82 v1(1150,1310)
  Bottom Layer w10: P2.4 P2.4@275,955 ; P2.4@275,970 450,1145 870,1145 1050,1325 1135,1325 v1(1150,1310)
SBUS_IN: P7.1 R2.2 | length 206
  Top Layer w24: P7.1@276.57,660 R2.2
SDIO_CK: P17.5 U1.80 | length 521.7
  Top Layer w10: U1.80 1375,1577.6 1375,1685 1490,1800 P17.5
SDIO_CMD: P17.4 U1.83 | length 744
  Top Layer w10: U1.83 1315,1578.54 1315,1730 1440,1855 1440,2090 1450,2100 1545,2100 1590,2055 P17.4
SDIO_D0: P17.6 U1.65 | length 1027.5
  Top Layer w10: U1.65 1566.42,1318.58 1590,1295 v1(1605,1295)
  Bottom Layer w10: P17.6 1325,1985 1325,1895 1425,1795 1425,1565 1635,1355 1635,1315 1615,1295 v1(1605,1295)
SDIO_D1: P17.7 U1.66 | length 913.2
  Top Layer w10: U1.66 1583.27,1338.27 1595,1350 v1(1590,1350)
  Bottom Layer w10: P17.7 1290,1890 1400,1780 1400,1540 v1(1590,1350)
SDIO_D2: P17.2 U1.78 | length 663.8
  Top Layer w10: U1.78 1415.51,1650.51 1550,1785 1550,1870 1670,1990 1730,1990 P17.2
SDIO_D3: P17.3 U1.79 | length 596.1
  Top Layer w10: U1.79 1395,1577.28 1395,1665 1525,1795 1525,1885 P17.3
SPI1_CS: IC1.22 U1.29 | length 575.8
  Top Layer w10: U1.29 1041.5,1031.5 1110,1100 v1(1110,1160) ; v1(1185,885) 1185.16,884.84 IC1.22
  Bottom Layer w10: v1(1110,1160) 1185,1085 v1(1185,885)
SPI1_MISO: IC1.9 spi_debug2.3 U1.31 | length 1461.3
  Top Layer w10: spi_debug2.3 540,135 735,330 810,330 985,505 985,690 ; v1(1025,705) 1000,705 985,690 ; U1.31 1080.87,930.87 985,835 985,690 ; v1(1185,725) 1185,720 1185.16,719.84 IC1.9
  Signal Layer 2 w10: v1(1025,705) 1045,725 v1(1185,725)
SPI1_MOSI: IC1.24 spi_debug2.2 U1.32 | length 1327.7
  Top Layer w10: U1.32 1100.55,905.55 v1(1035,840) 1072.44,840 1090.67,821.77 IC1.24
  Signal Layer 2 w7: v1(670,355) 670,640 805,775 925,775 990,840 v1(1035,840)
  Bottom Layer w7: spi_debug2.2 670,90 v1(670,355)
SPI1_SCK: IC1.23 spi_debug2.1 U1.30 | length 1368.6
  Top Layer w10: spi_debug2.1 740,265 v1(755,280) ; U1.30 1061.18,1021.18 1100,1060 v1(1130,1060) ; v1(1125,875) 1140,875 1165.47,849.53 IC1.23
  Signal Layer 2 w10: v1(755,280) 985,510 985,735 v1(1125,875)
  Bottom Layer w10: v1(1125,875) 1125,1045 1135,1055 v1(1130,1060)
USART1_RX: P13.3 U1.69 | length 794.6
  Top Layer w10: U1.69 1992.32,1397.32 v1(2010,1415)
  Bottom Layer w10: v1(2010,1415) 2050,1415 2080,1385 2080,1245 P13.3
USART1_TX: P13.2 U1.68 | length 847.1
  Top Layer w10: v1(1360,1365) 1372.64,1377.64 U1.68
  Bottom Layer w10: v1(1360,1365) 1585,1140 1875,1140 P13.2
USART2_RX: P12.3 U1.26 | length 1288.7
  Top Layer w10: v1(730,785) 870,785 982.44,897.44 U1.26
  Bottom Layer w10: v1(730,785) 700,755 700,550 1105,145 P12.3
USART2_TX: P12.2 U1.25 | length 1252.5
  Top Layer w10: v1(905,880) 905,1026.57 U1.25
  Bottom Layer w10: v1(905,880) 905,885 750,730 750,595 1205,140 P12.2
USART3_RX: P14.3 U1.56 | length 720.4
  Top Layer w10: U1.56@1534.49,1142.52 1702.52,1142.52 1735,1175 1735,1345 1765,1375 1960,1375 P14.3
USART3_TX: P14.2 U1.55 | length 614.9
  Top Layer w10: U1.55@1534.49,1122.83 1722.83,1122.83 1770,1170 1770,1340 1785,1355 1885,1355 1930,1310 P14.2
USART4_SBUS: Q1.1 R1.2 U1.24 | length 794.3
  Top Layer w10: U1.24 992.68,1062.68 1000,1070 v1(1005,1070)
  Top Layer w24: Q1.1 910,725 950,685 950,542.6 R1.2
  Bottom Layer w10: Q1.1 880,725 1005,850 v1(1005,1070)
pads on no net: B2.3 B2.4 IC1.1 IC1.2 IC1.3 IC1.4 IC1.5 IC1.6 IC1.7 IC1.12 IC1.14 IC1.15 IC1.16 IC1.17 IC1.19 IC1.20 IC1.21 U1.1 U1.2 U1.3 U1.4 U1.5 U1.7 U1.8 U1.9 U1.15 U1.16 U1.17 U1.18 U1.23 U1.33 U1.34 U1.38 U1.39 U1.41 U1.43 U1.44 U1.45 U1.46 U1.51 U1.52 U1.53 U1.54 U1.57 U1.58 U1.67 U1.70 U1.71 U1.81 U1.82 U1.84 U1.85 U1.86 U1.87 U1.88 U1.91 U1.97 U1.98
copper on no net: | length 777.9
  Top Layer w7: 1211.89,378.11 1225,378.11 1245,378.11 ; 1241.89,445 1245,441.89
  Top Layer w10: 1240,441.89 1245,441.89 ; 1246.93,443.82 1245,441.89 ; 1258.11,441.89 1245,441.89 ; 1432.24,443.82 1432.24,612.24 1469.8,649.8 ; 1475,570 1475,585 ; v1(1610,560) 1612.4,562.4 1612.4,705
  Top Layer w18: v1(1225,510) 1225,441.89 1231.89,435 1241.89,445
  Top Layer w22: v1(1490,520) 1490,575
  Top Layer w24: 1246.93,443.82 1337.76,443.82 ; 1258.11,441.89 1305.39,394.61 1337.76,394.61

## Polygon pours and split planes (outlines as drawn)
GND on Signal "GND-No Net" (solid, pour order 2): 2165,25 2165,2150 -10,2150 -10,25
GND on Bottom Layer "Bottom_GND" (solid, pour order 4): -10,2150 2165,2150 2165,25 -10,25
GND on Top Layer "Top_GND" (solid, pour order 6): -10,2150 2165,2150 2165,25 -10,25
3V3 on Signal Layer 2 "3V3_Pour" (solid, pour order 12): 213.27,1904.43 1824.43,1904.43 1825,1905 1860,1870 1860,215 540,215 530,205 205,530 205,565

## Keep-outs
Keep-Out Layer:
  lines w10: 2190,0 0,0 0,2120 2195,2120 2195,0

## Silkscreen, mask and mechanical layers (free items; w line width, h text height)
Top Overlay:
  drawing of 6 lines, arcs and shapes, not listed
  text "3V3" at 280,1965 h18
  text "JTCK" at 375,1965 h18
  text "GND" at 485,1965 h18
  text "JTMS" at 570,1965 h18
  text "NJNRST" at 655,1965 h18
  text "JSWO" at 770,1965 h18
  text "JTDI" at 875,1965 h18
  text "NRST" at 975,1965 h18
  text "Gnd" at 70,1925 h24
  text "-" at 2115,1400 h30 r270
  text "-" at 50,1380 h46 r270
  text "5V" at 1840,1370 h24 r90
  text "Rx" at 2040,1370 h24 r90
  text "Tx" at 1940,1365 h24 r90
  text "Sig" at 230,1360 h24
  text "+" at 155,1340 h46
  text "PB6" at 340,1300 h26 r270
  text "PB7" at 340,1195 h26 r270
  text "PB8" at 340,1090 h26 r270
  text "PB9" at 340,990 h26 r270
  text "PE9" at 340,890 h26 r270
  text "PE11" at 340,785 h26 r270
  text "Sig" at 1935,605 h24 r90
  text "5V" at 1305,165 h24 r270
  text "Range Finder" at 995,130 h26
  text "MI" at 525,125 h24
  text "MOSI" at 610,125 h24
  text "SCK" at 710,125 h24
Bottom Overlay:
  text "stm32 copter v1.0" at 1670,120 h30

## Text inside footprints (layer, text, board x,y; h text height)
Q1: Top Overlay "1" at 945,715 h30; Top Overlay "3_E" at 942.56,594.88 h30